# Altium PCB NODE - Copy.PcbDoc
Units mm, origin at the board's own origin, x right, y up, seen from the top; angles counter-clockwise.
Board outline 55.37 x 73.9 mm, 2 copper layers (Top Layer, Bottom Layer); 75 components, 54 nets, 254 pads, 55 vias.
Unrouted connection lines stored in the file: 1.
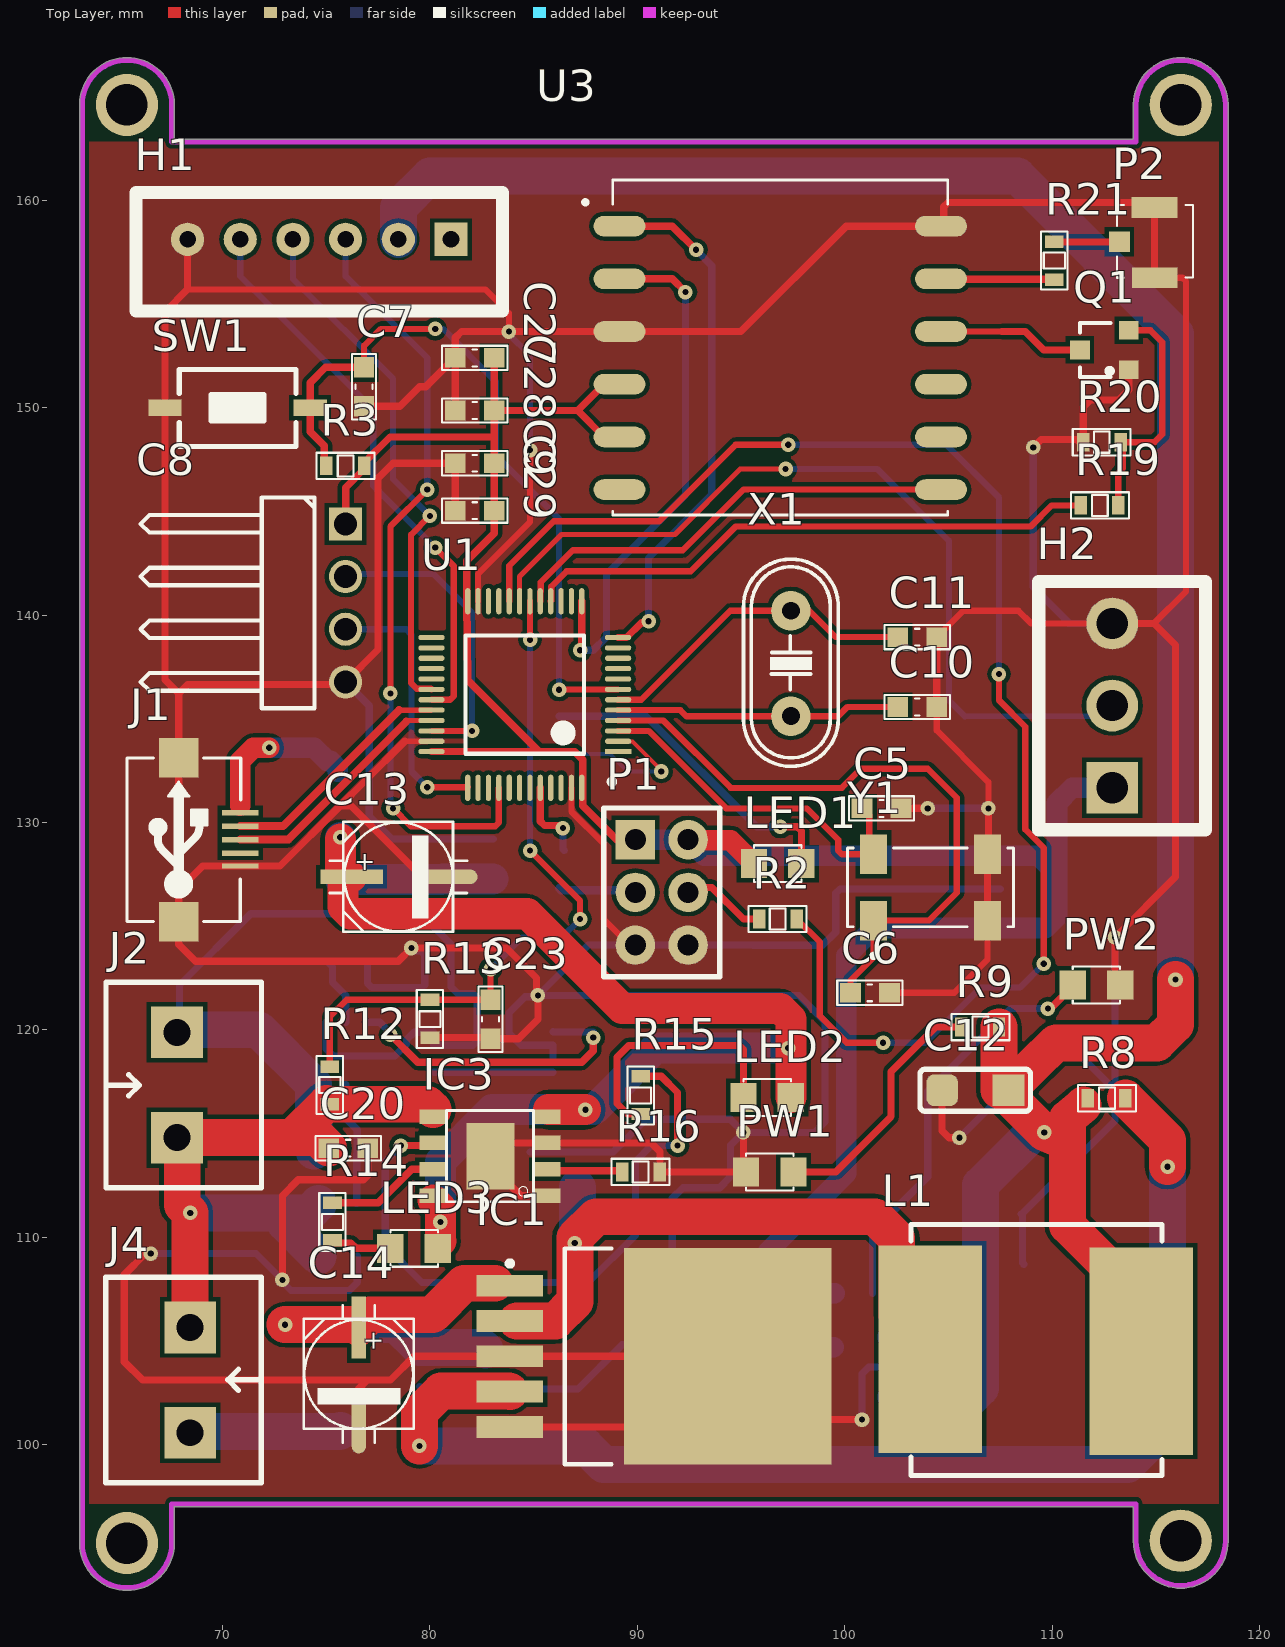
[diagram p0: Top Layer view]
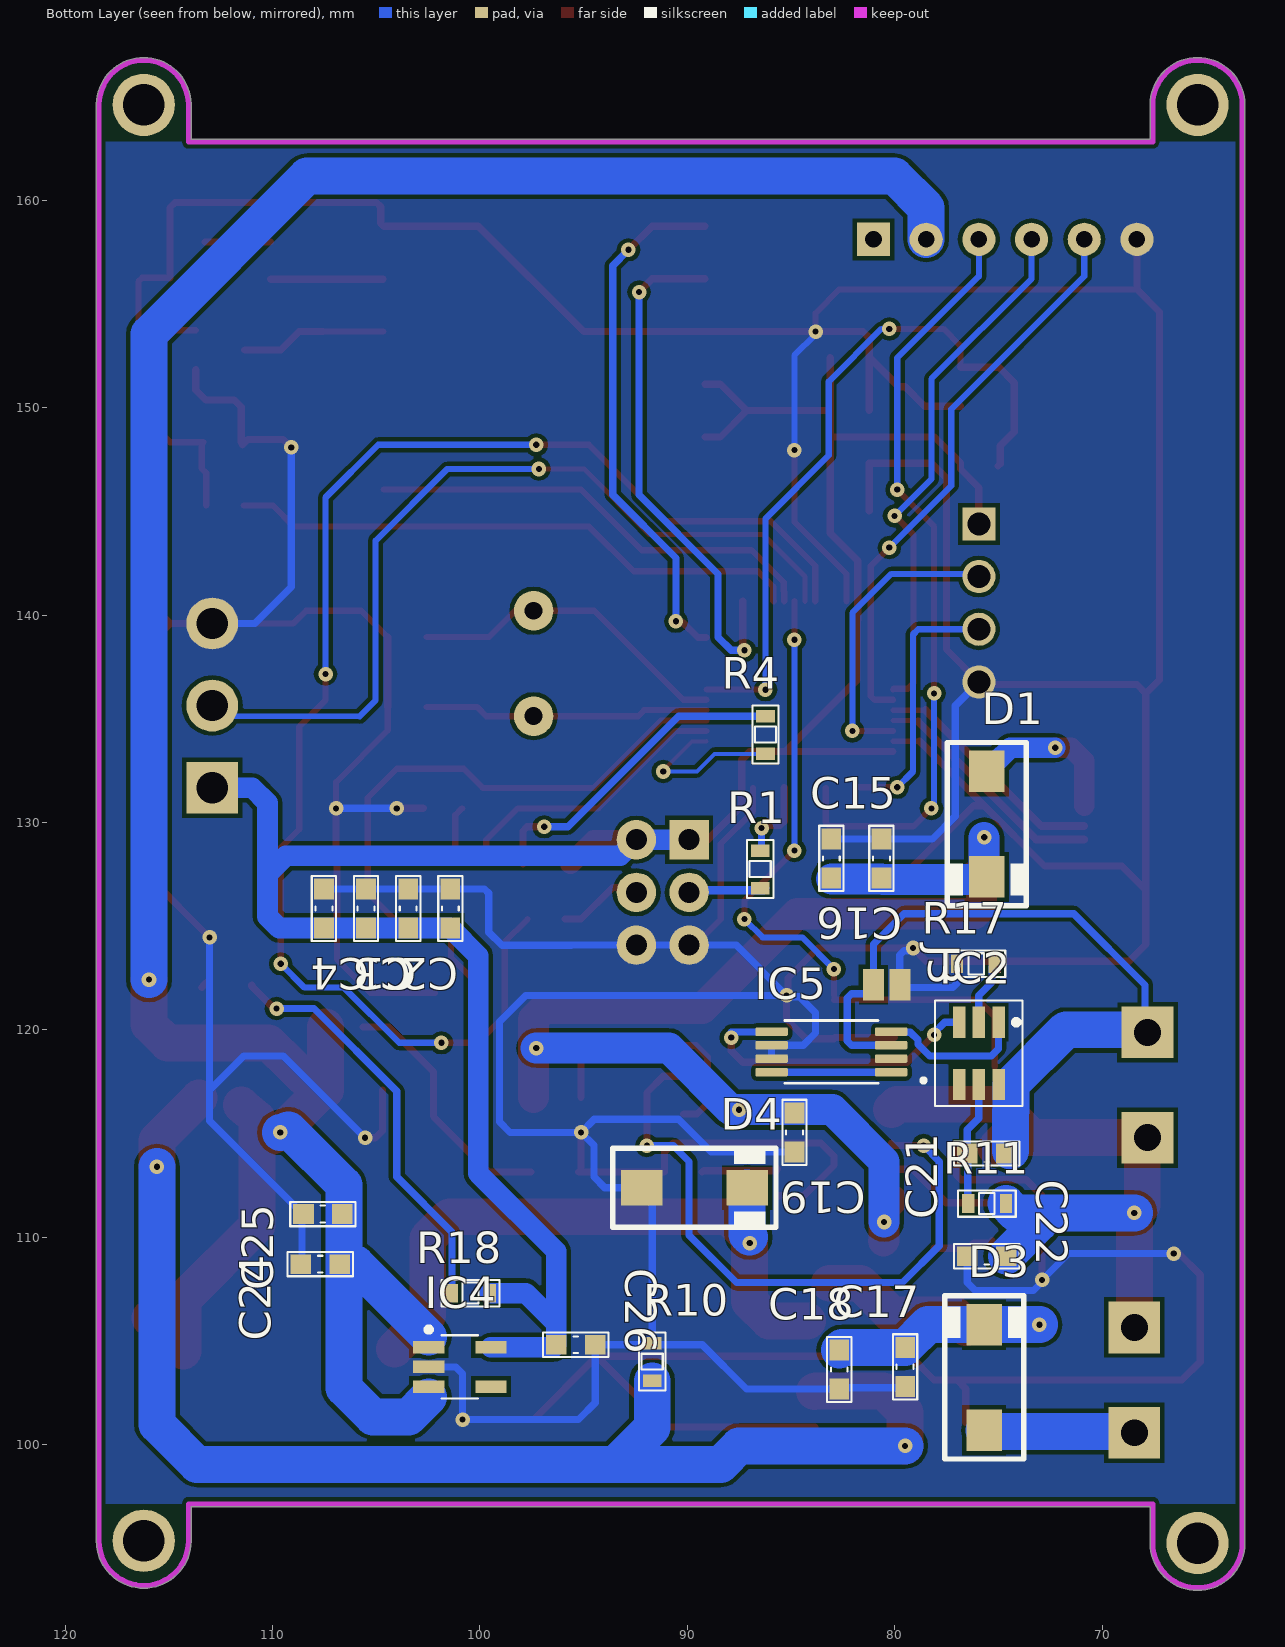
[diagram p1: Bottom Layer view, seen from below]
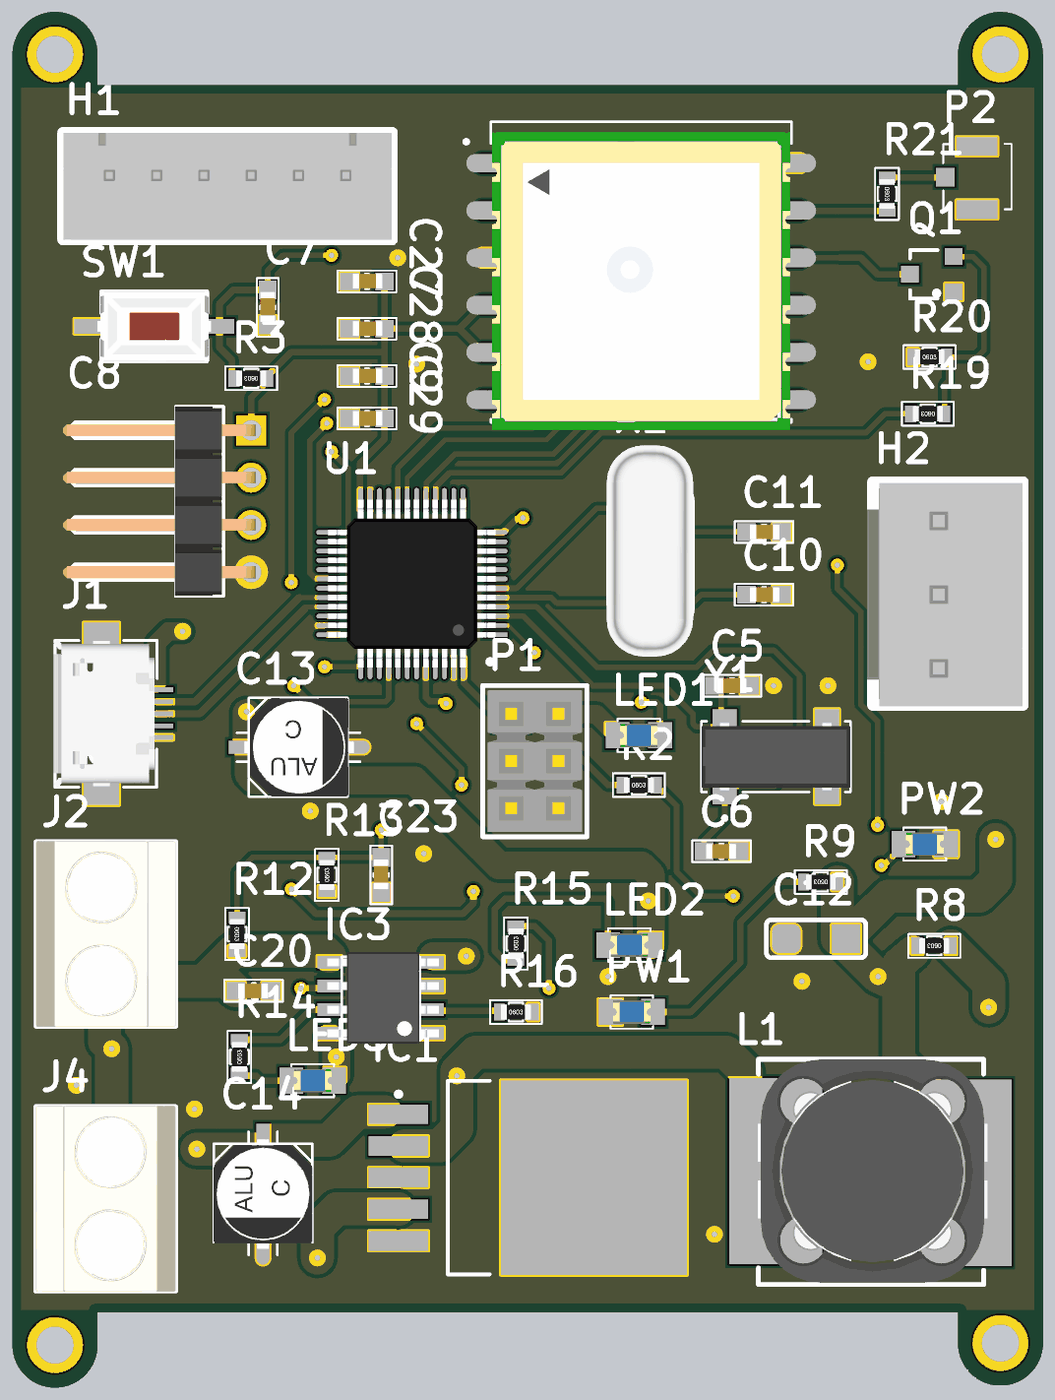
[diagram p2: 3D render of the assembled board from above, using the file's embedded part models]
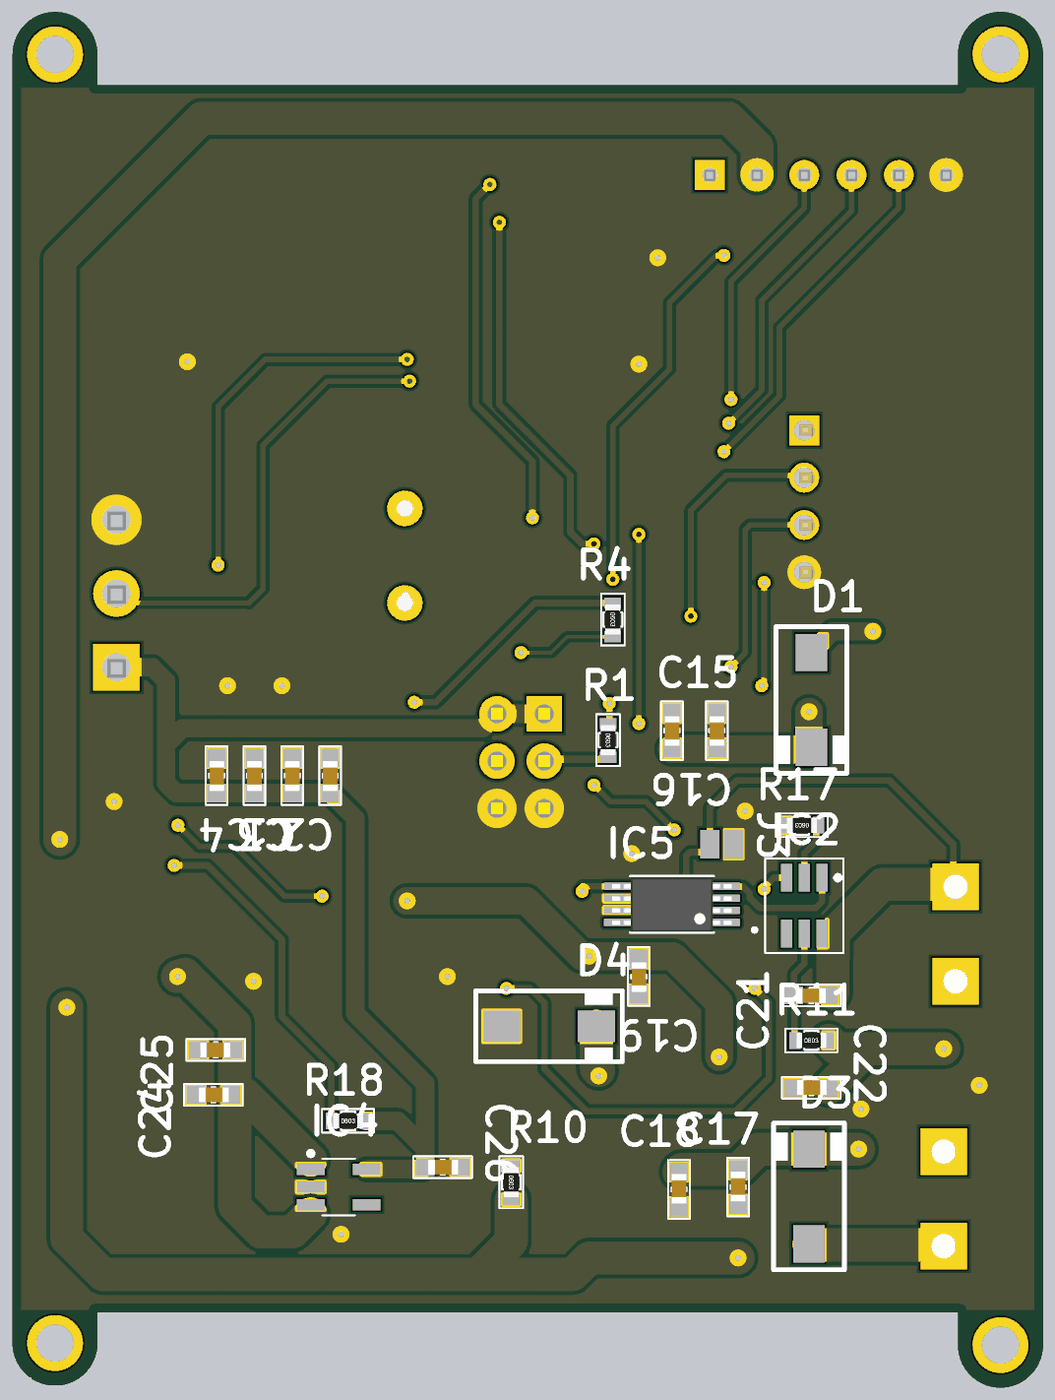
[diagram p3: 3D render of the assembled board from below, using the file's embedded part models]

## Layer stack, top to bottom
Top Solder: solder mask 0.0102, Solder Resist, Dk 3.5
Top Layer: signal copper 0.0356
Dielectric 1: dielectric 0.32, FR-4, Dk 4.8
Bottom Layer: signal copper 0.0356
Bottom Solder: solder mask 0.0102, Solder Resist, Dk 3.5

## Board outline
63.119,95.249 cw(c63.246,95.25) 63.119,95.254 63.119,164.609 cw(c63.246,164.609) 63.119,164.612 cw(c65.405,164.592) 67.691,164.611 cw(c67.564,164.61) 67.691,164.61 67.691,162.941 113.919,162.941 113.919,164.609 cw(c114.046,164.609) 113.923,164.641 cw(c116.205,164.592) 118.487,164.642 cw(c118.364,164.61) 118.491,164.61 118.491,95.36 cw(c118.364,95.36) 118.491,95.354 cw(c116.205,95.377) 113.919,95.353 cw(c114.046,95.359) 113.919,95.359 113.919,97.028 67.691,97.028 67.691,95.251 cw(c67.564,95.251) 67.691,95.244 cw(c65.405,95.268)

## Design rules (kind name [scope] priority, off if disabled: settings)
Clearance [All] p1: gap=0.2 ignorepadtopadclearanceinfootprint=TRUE
DiffPairsRouting [All] p1: maxlimit=0.254 minlimit=0.254 mostfreqgap=0.254 toplayer_minwidth=0.381 toplayer_maxwidth=0.381 toplayer_prefwidth=0.381 bottomlayer_minwidth=0.381 bottomlayer_maxwidth=0.381 bottomlayer_prefwidth=0.381 maxuncoupledlength=12.7
PolygonConnect [All] p1: connectstyle=Direct reliefconductorwidth=0.254 reliefentries=4 polygonreliefangle="90 Angle" airgapwidth=0.254
RoutingVias [All] p1: holewidth=0.3 width=0.7 viastyle="Through Hole" minholewidth=0.3 minwidth=0.7 maxholewidth=0.3 maxwidth=0.7
SolderMaskExpansion [All] p1: expansion=0.102
Width [All] p1: maxlimit=1.778 minlimit=0.2 preferedwidth=0.3 minimp=50.000000 maximp=50.000000 favimp=50.000000
29 further rules are at their usual default settings.

## Classes and differential pairs
component class 3.GPS: C27 C28 C29 P2 Q1 R19 R20 R21
component class 2.POWER_NODE: C12 C13 C14 C15 C16 C17 C18 C19 C20 C21 C22 C23 C24 C25 C26 D3 D4 IC1 IC2 IC3 IC4 IC5 J2 J3 J4 L1 LED2 LED3 PW1 PW2 R8 R9 R10 R11 R12 R13 R14 R15 R16 R17 R18
component class 1.MCU_NODE: C1 C2 C3 C4 C5 C6 C7 C8 C9 C10 C11 D1 H1 H2 J1 LED1 P1 R1 R2 R3 R4 SW1 U1 X1 Y1
differential pair USB: +USB_P -USB_N

## Components (designator, comment, footprint, x,y, rotation, side; value= is the part's Value field where it differs from the comment)
C1 "104,0603" CAP_0603 103.456,125.857 r270 bottom value=33p
C2 "104,0603" CAP_0603 101.424,125.857 r270 bottom value=33p
C3 "104,0603" CAP_0603 105.488,125.857 r270 bottom value=33p
C4 "104,0603" CAP_0603 107.52,125.857 r270 bottom value=33p
C5 "20pF,0603" CAP_0603 101.778,130.683 r180 top value=33p
C6 "20pF,0603" CAP_0603 101.219,121.793 r180 top value=33p
C7 "100nF,0603" CAP_0603 76.835,151.003 r90 top value=33p
C8 "Header4" JP4-D1C 73.406,135.509 r270 top
C9 "104,0603" CAP_0603 82.169,147.32 r0 top value=33p
C10 "20pF,0603" CAP_0603 103.505,135.572 r0 top value=33p
C11 "20pF,0603" CAP_0603 103.505,138.938 r0 top value=33p
C12 "220uF" CAP_TANTALUM_3216 106.299,117.094 r180 top value=220uF,tantalum3216
C13 "470uF/63V,ALU-SMD-C" CAP-ALU-SMD-C 78.523,127.381 r0 top value="Cap 470uF/63V"
C14 "470uF/63V, ALU-SMD-C" CAP-ALU-SMD-C 76.581,103.378 r270 top value="Cap 470uF/63V"
C15 "4.7uF" CAP_0603 80.645,128.27 r270 bottom value=4.7uF,0603
C16 "4.7uF" CAP_0603 83.058,128.27 r270 bottom value=100nF,0603
C17 "4.7uF" CAP_0603 79.502,103.759 r90 bottom value=4.7uF,0603
C18 "4.7uF" CAP_0603 82.677,103.632 r90 bottom value=100nF,0603
C19 "100nF,0603" CAP_0603 84.836,115.062 r270 bottom value=33p
C20 "100nF,0603" CAP_0603 76.073,114.3 r180 top value=33p
C21 "100nF,0603" CAP_0603 75.565,114.046 r0 bottom value=33p
C22 "100nF,0603" CAP_0603 75.565,109.093 r180 bottom value=33p
C23 "100nF,0603" CAP_0603 82.931,120.523 r90 top value=33p
C24 "4.7uF" CAP_0603 107.696,108.712 r180 bottom
C25 "10nF" CAP_0603 107.569,111.125 r0 bottom value=10uF
C26 "10uF" CAP_0603 95.377,104.826 r180 bottom
C27 "4.7uF" CAP_0603 82.169,152.4 r0 top value=10uF,0603
C28 "4.7uF" CAP_0603 82.169,149.86 r0 top value=100nF,0603
C29 "4.7uF" CAP_0603 82.169,145.034 r0 top value=100nF,0603
D1 "M7" SMA 75.565,129.921 r270 bottom value=1N4007
D3 "M7" SMA 75.692,103.251 r90 bottom value=1N4007
D4 "SMA" SMA 89.662,112.395 r180 bottom
H1 "Header 6P 2.54 Duc Thang" XH2.54M-6 81.026,158.115 r180 top
H2 "Header 3P VH3.96 Duc Thang" VH3.96M-3 112.903,133.656 r90 top
IC1 "LM2596" TO-263 89.861,104.267 r0 top
IC2 "DW01A" SOT23-6 75.946,118.872 r270 bottom
IC3 "TP4056" TP4056 82.906,113.919 r180 top
IC4 "AP7335A-33W5-7" SOT23-5 100.965,103.759 r180 bottom
IC5 "FS8205A" FS8205A 83.058,118.999 r0 bottom
J1 "USB-5" USB-M1 70.866,129.174 r90 top
J2 "JP2" KF2-5.08 67.818,117.348 r90 top
J3 "Jumper2" JUMPER2 79.756,122.174 r180 bottom
J4 "JP2" KF2-5.08 68.453,103.124 r270 top
L1 "33uH" Inductor_SMD 115.3,98.521 r90 top value=220uH
LED1 "LED" LED-0805-Blue 95.631,128.016 r0 top value="LED 3 ly Single Colour"
LED2 "LED" LED-0805-Blue 97.409,116.751 r180 top value="LED 3 ly Single Colour"
LED3 "LED" LED-0805-Blue 80.391,109.474 r180 top value="LED 3 ly Single Colour"
P1 "Header 3x2" "Header 3x2" 89.916,129.174 r270 top
P2 "IPX" IPXS 113.665,157.988 r180 top
PW1 "3V8" LED-0805-Blue 97.536,113.157 r180 top value=Red
PW2 "LED 0805" LED-0805-Blue 110.998,122.174 r0 top value=Red
Q1 "2SC1815" SOT23 112.522,152.781 r90 top value=C1815
R1 "100k,0603" RES-SMD-0603 86.487,127.762 r270 bottom
R2 "100k,0603" RES-SMD-0603 96.774,125.349 r0 top
R3 "4k7,0603" RES-SMD-0603 75.946,147.193 r180 top
R4 "510R,0603" RES-SMD-0603 86.233,134.239 r270 bottom
R8 "10k,0603" RES-SMD-0603 112.649,116.713 r180 top value=10k
R9 "1k,0603" RES-SMD-0603 106.553,120.142 r180 top value=1k
R10 "4.7k,0603" RES-SMD-0603 91.694,104.013 r270 bottom value=3.3k
R11 "0.1k,0603" RES-SMD-0603 75.565,111.633 r180 bottom
R12 "30k,0603" RES-SMD-0603 75.184,117.348 r270 top
R13 "100k,0603" RES-SMD-0603 80.01,120.523 r90 top
R14 "1k,0603" RES-SMD-0603 75.311,110.744 r90 top
R15 "1k,0603" RES-SMD-0603 90.169,116.84 r90 top
R16 "1k2,0603" RES-SMD-0603 90.17,113.157 r0 top
R17 "1k,0603" RES-SMD-0603 76.073,123.19 r0 bottom
R18 "1k" RES-SMD-0603 100.457,107.315 r180 bottom
R19 "4k7,0603" RES-SMD-0603 112.306,145.288 r180 top
R20 "10k,0603" RES-SMD-0603 112.395,148.336 r0 top
R21 "0R,0603" RES-SMD-0603 110.109,157.099 r270 top
SW1 "SW" SW-SMD 70.739,149.987 r180 top value="SW chip 2 pin"
U1 "STM32" "LQFP 48" 84.582,136.144 r180 top
U3 "L80-M39" XCVR_L80-M39 96.901,152.4 r0 top
X1 "4Mhz" XT2 97.409,137.668 r270 top
Y1 "MC-306_32.768K-E3" XTAL_MC-306_32.768K-E3 104.14,126.873 r90 top

## Footprints (in the part's own frame and the unit in brackets; to place one, negate y for a bottom-side part, rotate by r counter-clockwise, add the part's x,y. Pads: shape width x height; smd on the part's side, far side on the other; paste and mask are expansions set on the pad)
CAP-ALU-SMD-C [mm]
  rect 3x0.7 smd: 1(-2.286,0)
  oval 3x0.7 smd: 2(2.286,0)
  silkscreen extent -3.35,-2.65 3.28,2.65, body extent -2.95,-2.65 2.95,2.65, height 5.41
CAP_0603 [mm]
  rect 1x0.95 smd mask+0.076: 1(-0.94,0) 2(0.94,0)
  silkscreen extent -1.57,-0.58 1.57,0.58, body extent -0.77,-0.39 0.83,0.41, height 0.9
CAP_TANTALUM_3216 [mil]
  rect 60x60 smd: 1(-62.99,0)
  rrect50% 60x60 smd: 2(62.99,0)
  silkscreen extent -105,-40 105,40, body extent -67,-35 67,35, height 67
FS8205A [mm]
  rrect25% 1.56x0.4 smd: 1(-2.88,1.031) 2(-2.88,0.381) 3(-2.88,-0.269) 4(-2.88,-0.919) 5(2.88,-0.919) 6(2.88,-0.269) 7(2.88,0.381) 8(2.88,1.031)
  silkscreen extent -4.54,-1.46 2.25,1.57, body extent -3.2,-1.4 3.2,1.53, height 1.2
"Header 3x2" [mil] "Connector; Header; 6 Position; 2 Row; Solder Pad 35mil"
  rect 75x75 hole 40: 1(0,0)
  round 75 hole 40: 2(0,100) 3(100,0) 4(100,100) 5(200,0) 6(200,100)
  silkscreen extent -60,-60 260,160, body extent -50,-50 250,150, height 83
Inductor_SMD [mm]
  rect 10x5 smd: 1(6.096,11.176) 2(6,1)
  silkscreen extent 0,0 12.1,12.1, body extent 0.1,-0.2 12.1,12.14, height 7.15
IPXS [mm] "SOT 23 _ 1-3-2"
  rect 1x1 smd: 1(0.415,-0.01)
  rect 2.2x1 smd: 2(-1.273,-1.658) 3(-1.278,1.73)
  silkscreen extent -3.13,-1.79 0.53,1.73, body extent -2.83,-1.49 0.31,1.56, height 1.55
JP4-D1C [mm] "4 pins, 1 row, right angled, gold plating"
  rect 1.6x1.6 hole 1.1: 1(-8.89,2.54)
  round 1.6 hole 1.1: 2(-6.35,2.54) 3(-3.81,2.54) 4(-1.27,2.54)
  silkscreen extent -10.16,-7.34 0,1.04, body extent -10.16,-7.57 0,2.79, height 2.54
JUMPER2 [mil]
  rect 40x60 smd: 1(-50,0) 2(0,0)
KF2-5.08 [mm]
  rect 2.5x2.5 hole 1.3: 1(-2.54,0) 2(2.54,0)
  silkscreen extent -4.95,-4.08 4.95,3.43, body extent -5,-4.07 5,3.43, height 10
LED-0805-Blue [mil]
  rect 50x55 smd: 1(0,0) 2(90,0)
  silkscreen extent 0,-35 90,35, body extent 5,-25 85,25, height 43
"LQFP 48" [mm]
  rect 1.27x0.25 smd: 1(-4.498,2.725)
  oval 1.27x0.25 smd: 2(-4.498,2.225) 3(-4.498,1.725) 4(-4.498,1.225) 5(-4.498,0.725) 6(-4.498,0.225) 7(-4.498,-0.275) 8(-4.498,-0.775) 9(-4.498,-1.275) 10(-4.498,-1.775) 11(-4.498,-2.275) 12(-4.498,-2.775) 25(4.498,-2.775) 26(4.498,-2.275) 27(4.498,-1.775) 28(4.498,-1.275) 29(4.498,-0.775) 30(4.498,-0.275) 31(4.498,0.225) 32(4.498,0.725) 33(4.498,1.225) 34(4.498,1.725) 35(4.498,2.225) 36(4.498,2.725)
  oval 0.25x1.27 smd: 13(-2.75,-4.524) 14(-2.25,-4.524) 15(-1.75,-4.524) 16(-1.25,-4.524) 17(-0.75,-4.524) 18(-0.25,-4.524) 19(0.25,-4.524) 20(0.75,-4.524) 21(1.25,-4.524) 22(1.75,-4.524) 23(2.25,-4.524) 24(2.75,-4.524) 37(2.75,4.473) 38(2.25,4.473) 39(1.75,4.473) 40(1.25,4.473) 41(0.75,4.473) 42(0.25,4.473) 43(-0.25,4.473) 44(-0.75,4.473) 45(-1.25,4.473) 46(-1.75,4.473) 47(-2.25,4.473) 48(-2.75,4.473)
  silkscreen extent -4.33,-2.88 2.85,4.3, body extent -4.5,-4.53 4.5,4.47, height 1.5
RES-SMD-0603 [mm]
  rect 0.6x0.9 smd: 1(-0.889,0) 2(0.927,0)
  silkscreen extent -1.4,-0.64 1.4,0.64, body extent -0.8,-0.4 0.8,0.4, height 0.43
SMA [mm]
  rect 2x1.7 smd: 1(-2.544,0) 2(2.544,0)
  silkscreen extent -3.94,-1.9 3.94,1.91, body extent -2.87,-1.4 2.87,1.4, height 2.29
SOT23 [mm] "SOT-23; 3 Leads; Body 3.1 x 2.5 mm, inc. leads (LxW max), Alternate Lead Configuration"
  rect 0.9x0.95 smd: 1(-0.95,-1.175) 2(0,1.175) 3(0.95,-1.175)
  silkscreen extent -1.3,-0.38 1.3,1.18
SOT23-5 [mm] "SOT23, 5-Leads, Body 3.0x3.0mm (max), Pitch 0.95mm, IPC Medium Density"
  rect 1.5x0.6 smd: 1(-1.5,0.95) 2(-1.5,0) 3(-1.5,-0.95) 4(1.5,-0.95) 5(1.5,0.95)
  silkscreen extent -1.63,-1.52 0.87,1.92, body extent -1.75,-1.52 1.75,1.53, height 1.45
SOT23-6 [mm] "SOT23, 5-Leads, Body 3.0x3.0mm (max), Pitch 0.95mm, IPC Medium Density"
  rect 1.5x0.6 smd: 1(-1.5,0.95) 2(-1.5,0) 3(-1.5,-0.95) 4(1.5,-0.95) 5(1.5,0) 6(1.5,0.95)
  silkscreen extent -2.54,-2.11 2.54,2.11, body extent -1.75,-1.52 1.75,1.53, height 1.45
SW-SMD [mm] "Switch SMD type"
  rect 1.6x0.8 smd: 1(-3.5,0) 2(3.5,0)
  silkscreen extent -2.82,-1.85 2.82,1.85, body extent -3.05,-1.85 3.05,1.85, height 2.5
TO-263 [mm]
  rect 3.2x1.05 smd: 1(-6,3.4) 2(-6,1.7) 3(-6,0) 4(-6,-1.7) 5(-6,-3.4)
  rect 10x10.45 smd: 6(4.5,0)
  silkscreen extent -6.12,-5.2 -1.1,5.2, body extent -6.58,-5.2 7.57,5.2, height 4.65
TP4056 [mm]
  rect 1.3x0.7 smd: 1(-2.75,1.905) 2(-2.75,0.635) 3(-2.75,-0.635) 4(-2.75,-1.905) 5(2.75,-1.905) 6(2.75,-0.635) 7(2.75,0.635) 8(2.75,1.905)
  rect 2.3x3.2 smd: 3(-0.025,0)
  silkscreen extent -2.1,-2.2 2.1,2.2, body extent -3.13,-2.45 2.87,2.45, height 1.75
USB-M1 [mil]
  rect 10x70 smd: 1(51.18,0) 2(25.59,0) 3(0,0) 4(-25.59,0) 5(-50,0)
  rect 74.8x74.8 smd: 5(-155.51,116.84) 5(155.51,116.84)
  silkscreen extent -155,-1 155,215, body extent -157,5 158,218, height 107
VH3.96M-3 [mm]
  rect 2.5x2.5 hole 1.5: 1(-1.98,0)
  round 2.5 hole 1.5: 2(1.98,0) 3(5.94,0)
  silkscreen extent -4,-4.5 7.96,3.54, body extent -4.08,-4.49 7.92,3.88, height 10.26
XCVR_L80-M39 [mm]
  oval 2.5x1 smd paste-2: 1(-7.75,6.35) 2(-7.75,3.81) 3(-7.75,1.27) 4(-7.75,-1.27) 5(-7.75,-3.81) 6(-7.75,-6.35) 7(7.75,-6.35) 8(7.75,-3.81) 9(7.75,-1.27) 10(7.75,1.27) 11(7.75,3.81) 12(7.75,6.35)
  silkscreen extent -9.5,-7.57 8.08,8.57, body extent -8,-8 8,8, height 7.05
XH2.54M-6 [mm]
  rect 1.6x1.6 hole 0.8: 1(0,0)
  round 1.6 hole 0.8: 2(2.54,0) 3(5.08,0) 4(7.62,0) 5(10.16,0) 6(12.7,0)
  silkscreen extent -2.48,-2.26 15.18,3.46, body extent -2.48,-2.26 15.18,3.48, height 6.91
XT2 [mil] "Footpin for Crystal 2 pin"
  round 75 hole 34: 1(-100,0) 2(100,0)
  silkscreen extent -198,-90 195,90, body extent -233,-93 213,90, height 138
XTAL_MC-306_32.768K-E3 [mm]
  rect 1.9x1.3 smd: 1(-1.6,2.75) 2(-1.6,-2.75) 3(1.6,-2.75) 4(1.6,2.75)
  silkscreen extent -3.4,-4 1.9,4, body extent -1.85,-4 1.85,4, height 2.54

## Part data
C1 C2 C3 C4 C5 C6 C7 C9 C10 C11 C19 C20 C21 C22 C23: library part CapSMD, "Capacitor", LatestRevisionDate=17-Jul-2002, LatestRevisionNote="Re-released for DXP Platform.", PackageReference=RAD-0.3, Published=8-Jun-2000, Publisher="Altium Limited"
C8: "Header IDC, 4 x 1 Pin Vertical 2.54mm Pitch (Non-Boxed, Male)", Manufacturer="W¨¹rth Elektronik eiSos GmbH", partNo=613002143121, ComponentLink1 Description=Manufacturer, ComponentLink1URL=http://www.we-online.com, ComponentLink2 Description=Datasheet, ComponentLink2URL=http://katalog.we-online.de/em/datasheet/6130xx143121.pdf, Created by="Karrer Zheng", Created Date="29 March 2013", NoPins=02
C12: library part CP5, "220µF Molded Tantalum Polymer Capacitor 16V 2917 (7343 Metric) 40mOhm @ 100kHz", Manufacturer="AVX Corporation", Package=2917, Part Number=TCME227M016R0040E, Category=CAPACITOR, User_Description="CAP TANT POLY 220UF 16V 2917"
C13 C14: library part CP3, "Cap 470uF/63V"
C15 C16 C17 C18 C24 C27 C28 C29: library part C, "4.7µF ±10% 35V Ceramic Capacitor X5R 0805 (2012 Metric)", Manufacturer="Samsung Electro-Mechanics", Package=0805, Part Number=CL21A475KLCLQNC, Category=CAPACITOR, User_Description="CAP CER 4.7UF 35V X5R 0805"
C25 C26: library part C, "Cap SMD", Manufacturer="Samsung Electro-Mechanics", Package=0805, Part Number=CL21A106KPFNNNG, Category=CAPACITOR, User_Description="CAP CER 10UF 10V X5R 0805"
D1 D3: library part D1A, "Diode 1A"
D4: library part "Diode Zener", "Zener Diode", LatestRevisionDate=17-Jul-2002, LatestRevisionNote="Re-released for DXP Platform.", PackageReference=DIODE-0.7, Published=8-Jun-2000, Publisher="Altium Limited"
H1 H2: "C?m", Chung_Loai=C?m, Don_Vi=Con
  H1: Ma_Hang=MH001972, Ten_Linh_Kien="Header 6P XH2.54-6P Ð?c Th?ng"
  H2: Ma_Hang=MH001292, Ten_Linh_Kien="Header 3P XH2.54-3P Ð?c Th?ng"
IC1: library part LM2576, "LM2576"
IC2: "One Cell Lithium-ion/Polymer Battery Protection IC"
IC3: "Complete single cell Li-Ion battery with a constant current / constant voltage linear charger"
IC4: Package=SOT23-5, Part Number=AP7335A-33W5-7
J1: Manufacturer=FCI, Manufacturer Part Number=10118193-0001LF, Supplier Part Number 1=609-4616-1-ND, .Checked PCB=RF, .Checked SCH=MM, .Creator=MM, Category="Connectors, Interconnects", ComponentLink1Description=http://portal.fciconnect.com/Comergent//fci/drawing/10118193.pdf, ComponentLink1URL=http://portal.fciconnect.com/Comergent//fci/drawing/10118193.pdf, Connector Type="USB - micro B", Features="Shielded, Solder Retention", Gender=Receptacle, Ingress Protection=-, Mounting Type="Surface Mount, Right Angle, Horizontal", Number of Contacts=5, Packaging="Cut Tape (CT)", Pricing 1="1=0.46, 10=0.433, 25=0.3712, 50=0.3156, 100=0.3032, 250=0.27224, 500=0.25988 (USD)", RoHS="RoHS Compliant", Specifications="USB 2.0", Stock 1=28642, Supplier 1=Digi-Key
J2 J4: "WR-PHD 2.54 mm Angled Socket Header", Manufacturer="W¨¹rth Elektronik eiSos GmbH", partNo=613002143121, ComponentLink1 Description=Manufacturer, ComponentLink1URL=http://www.we-online.com, ComponentLink2 Description=Datasheet, ComponentLink2URL=http://katalog.we-online.de/em/datasheet/6130xx143121.pdf, Created by="Karrer Zheng", Created Date="29 March 2013", NoPins=02
J3: "Jumper, 2-Pin"
L1: library part L1, "22µH Shielded Inductor 1.65A 96mOhm Max Nonstandard", Manufacturer="Bourns Inc.", Package=SMD, Part Number=SRR0745A-220M, Category=INDUCTORS, User_Description="FIXED IND 22UH 1.65A 96 MOHM SMD"
LED1 LED2 LED3: "LED Single colour Green and Red"
P1: "Header, 6-Pin, 2-Row", LatestRevisionDate=17-Jul-2002, LatestRevisionNote="Re-released for DXP Platform.", Publisher="Altium Limited"
P2: library part IPXSx66, "Antenna GSM GPS", Manufacturer="TE Connectivity AMP Connectors", Package=SMD, Part Number=2334884-1, Category=Connectors, User_Description="UMCC MICRO-COAX RECEPTACLE, GEN"
PW1 PW2: library part LED, "LED RED DIFFUSED 0805 SMD", Manufacturer="OSRAM Opto Semiconductors Inc.", Package=0805, Part Number="LS R976-NR-1", Category="LED SMD", User_Description="LED RED DIFFUSED 0805 SMD"
Q1: "NPN 600mW, ECB", =C828
R1 R2 R3 R4 R11 R12 R13 R14 R15 R16 R17 R19 R20 R21: library part "Resistor - SMD", "Resistor SMD", Manufacturer="Generic Components", CLASS=Passive, Published=08/06/2000, Publisher="Altium Hobart Technology Centre"
R8: library part R, "RES SMD 10K OHM 1% 1/8W 0805", Manufacturer=Yageo, Package=0805, Part Number=RC0805FR-0710KL, Category=RESISTORS, User_Description="RES SMD 10K OHM 1% 1/8W 0805"
R9 R18: library part R, "Resistor 1/4W", Manufacturer=Yageo, Package=0805, Part Number=RC0805FR-071KL, Category=RESISTORS, User_Description="RES SMD 1K OHM 1% 1/8W 0805"
R10: library part R, "RES SMD 3.3K OHM 1% 1/8W 0805", Manufacturer=Yageo, Package=0805, Part Number=RC0805FR-073K3L, Category=RESISTORS, User_Description="RES SMD 3.3K OHM 1% 1/8W 0805"
SW1: library part SW2, "Switch button 2 pin"
U1: library part STM32F103C8T6, "STM32 ARM-based 32-bit MCU with 64 Kbytes Flash, 64-pin LQFP, Industrial Temperature"
U3: "L80 is an ultra compact GPS POT (Patch on Top) module with an embedded 15.0mm × 15.0mm × 4.0mm patch antenna.", Package=None, Availability=Warning, Check_prices=https://www.snapeda.com/parts/L80-M39/Quectel/view-part/51186/?ref=eda, MF=Quectel, MP=L80-M39, Price=None, Purchase-URL=https://pricing.snapeda.com/search/part/L80-M39/?ref=eda, SnapEDA_Link=https://www.snapeda.com/parts/L80-M39/Quectel/view-part/51186/?ref=snap
X1: library part XT2, "Crystal For all Crystal 2pin."
Y1: "CRYSTAL 32.7680KHZ 6PF SMD", Package="NON STANDARD-4 EPSON", Availability="In Stock", Check_prices=https://www.snapeda.com/parts/MC-306%2032.768K-E3/EPSON/view-part/?ref=eda, MF=EPSON, MP="MC-306 32.768K-E3", Price=None, Purchase-URL="https://pricing.snapeda.com/search/part/MC-306 32.768K-E3/?ref=eda", SnapEDA_Link=https://www.snapeda.com/parts/MC-306%2032.768K-E3/EPSON/view-part/?ref=snap

## Free pads (board coordinates)
  round 3 hole 2: 0(65.405,95.268) 0(65.405,164.592) 0(116.205,95.377) 0(116.205,164.592)

## Via types
v1: diameter 0.7, hole 0.3, Top Layer to Bottom Layer, 55 vias

## Nets (pads, with @x,y where several pads share a name; then routed paths per layer and width w, separated by ;. In a path a pad name is that pad's centre, name@x,y a point inside that pad or via, vN(x,y) a via of type N, cw(c..) or ccw(c..) an arc to the next point about the centre after c; other vN are vias at no path point)
3V3: C1.2 C2.2 C3.2 C4.2 C8.1 C9.2 C26.1 C27.2 C28.2 C29.2 H2.1 IC4.5 LED1.1 P1.1 P1.2 R3.1 R18.2 U1.24 U1.36 U1.48 U3.4 U3.5 | length 124.4
  Top Layer w0.2: 85.275,133.419 85.344,133.419
  Top Layer w0.35: C8.1 75.946,146.154 76.835,147.043 R3.1 76.835,147.343 78.082,148.59 83.109,148.59 ; U1.36 85.275,133.419 81.832,136.862 81.788,140.667 81.788,142.621 83.109,143.942 C29.2 C9.2 83.109,148.59 ; C27.2 C28.2 ; 85.344,133.419 86.995,133.419 87.382,133.032 87.382,130.804 89.012,129.174 P1.1 ; U3.5 88.401,148.59 87.131,149.86 ; U3.4 88.401,151.13 87.131,149.86 ; 83.109,148.59 C28.2 ; C28.2 87.131,149.86
  Top Layer w1: P1.2 92.48,129.15 94.497,129.15 LED1.1
  Bottom Layer w1: P1.1 P1.2 93.233,128.397 109.347,128.397 110.236,127.508 ; IC4.5 96.434,104.709 C26.1 96.317,105.842 ; R18.2 97.79,107.315 96.317,105.842 ; H2.1 110.975,131.676 110.236,130.937 110.236,127.508 ; 96.317,105.842 96.317,109.33 100.076,113.089 100.076,123.569 C2.2 C1.2 C3.2 C4.2 109.677,124.917 110.236,125.476 110.236,127.508
3V8: C12.1 C24.2 C25.1 H1.2 IC4.1 IC4.3 L1.2 R8.2 R9.1 | length 133.4
  Top Layer w1.778: R9.1 107.442,117.094 C12.1@107.721,116.967 ; R8.2@111.506,116.375 110.744,115.734 110.744,114.566 ; L1.2@115.897,106.118 L1.2 114.3,107.021 110.744,110.577 110.744,114.566 ; v1(115.951,122.428) 115.951,120.269 115.062,119.38 110.185,119.38 107.875,117.118 C12.1@107.721,116.967 ; C12.1@107.721,116.967 v1(109.626,115.062) 110.744,114.566
  Bottom Layer w1.778: H1.2 78.486,159.639 80.01,161.163 108.331,161.163 115.951,153.543 v1(115.951,122.428) ; 102.465,102.316 103.435,101.346 105.156,101.346 106.553,102.743 C24.2@106.553,108.712 ; 102.465,105.202 105.975,108.712 C24.2@106.553,108.712 ; v1(109.626,115.062) 109.22,115.189 106.553,112.522 C24.2@106.553,108.712
5V: C13.1 C15.2 C16.2 C19.1 D1.2 IC3.4 IC3.8 LED2.1 LED3.1 | length 66.3
  Top Layer w1.5: C13.1@75.692,127.508 v1@75.692,129.21 ; C13.1 75.969,127.381 75.819,127.231 75.819,125.935 76.151,125.603 84.709,125.603 89.281,121.031 96.901,121.031 97.409,120.523 LED2.1 ; IC3.8@80.156,111.791 80.518,111.429 v1(80.518,110.744) 80.518,109.855 LED3.1@80.537,109.836 ; IC3.4@85.725,116.158 v1(87.503,116.158)
  Bottom Layer w1.5: v1(75.692,129.286) 75.692,127.25 80.565,127.25 80.645,127.279 C16.2@83.058,127.279 ; v1(80.518,110.744) 80.518,113.666 83.01,116.158 84.836,116.158 v1(87.503,116.158) 87.92,116.158 90.888,119.126 v1(97.282,119.126)
ADC2: H2.2 U1.19 | length 41.6
  Top Layer w0.25: U1.19 84.332,141.863 86.36,143.891 91.821,143.891 94.973,147.043 v1(97.155,147.043)
  Bottom Layer w0.25: 105.791,135.128 112.395,135.128 H2.2
  Bottom Layer w0.3: v1(97.155,147.043) 101.574,147.043 105.029,143.588 105.029,135.89 105.791,135.128
ANT: H1.1
BOOT0: R1.1 U1.44 | length 3.9
  Top Layer w0.35: U1.44 85.332,130.06 85.537,129.855 86.299,129.855 v1(86.423,129.731)
  Bottom Layer w0.35: v1(86.423,129.731) 86.423,128.715 R1.1
BOOT1: R2.2 U1.20 | length 70.2
  Top Layer w0.3: U1.20 83.832,142.379 85.979,144.526 91.059,144.526 94.743,148.21 v1(97.282,148.21) ; R2.2 98.806,124.244 98.806,120.682 100.108,119.38 v1(101.854,119.38) ; v1(107.442,137.16) 107.442,135.89 108.712,134.62 108.712,129.667 109.601,128.778 v1(109.601,123.19)
  Bottom Layer w0.3: v1(97.282,148.21) 104.901,148.21 107.442,145.669 v1(107.442,137.16) ; v1(101.854,119.38) 103.886,119.38 106.553,122.047 108.458,122.047 v1(109.601,123.19)
EX_ANT: R21.2 U3.11 | length 5.5
  Top Layer w0.3: U3.11 U3.11@104.67,156.191 ; R21.2@110.09,156.191 R21.2
  Top Layer w0.35: U3.11@104.67,156.191 R21.2@110.09,156.191
GND: C1.1 C2.1 C3.1 C4.1 C5.1 C6.1 C7.1 C8.4 C9.1 C10.2 C11.2 C12.2 C13.2 C14.2 C15.1 C16.1 C17.1 C18.1 C19.2 C20.1 C22.1 C23.1 C24.1 C25.2 C26.2 C27.1 C28.1 C29.1 D4.1 H1.6 H2.3 IC1.3 IC1.5 IC1.6 IC3.1 IC3.3 IC4.2 IC5.6 IC5.7 J1.5 J3.2 P1.5 P1.6 P2.2 P2.3 PW1.2 PW2.2 Q1.1 R10.1 R13.1 R16.2 R17.2 R20.1 SW1.2 U1.23 U1.35 U1.47 U3.3 U3.12 Y1.2 Y1.3 | length 548.5
  Top Layer w0.25: 78.801,133.919 U1.35
  Top Layer w0.3: 68.326,155.702 82.677,155.702 83.82,154.559 v1(83.82,153.67) ; U1.23 82.332,141.986 84.836,144.49 v1(84.836,147.955) ; U1.47 86.832,130.532 88.392,128.972 88.392,125.349 89.647,124.094 P1.5 ; C6.1 105.283,121.793 106.89,123.4 Y1.2 ; C10.2 104.445,134.442 106.934,131.953 v1(106.934,130.683) ; C11.2 105.715,140.208 108.377,140.208 108.989,139.596 H2.3 ; 114.912,139.596 116.459,141.143 116.459,156.088 116.283,156.263 114.948,156.263 P2.3
  Top Layer w0.35: v1(66.548,109.22) 66.294,109.22 65.278,108.204 65.278,104.013 66.167,103.124 77,103.124 ; H1.6 68.326,155.702 67.239,154.615 SW1.2 67.239,136.883 67.898,136.224 ; v1(72.898,107.95) 72.898,112.014 73.66,112.776 76.808,112.776 77.013,112.981 C20.1 ; C14.2 76.581,102.705 77,103.124 ; C7.1 78.562,150.063 79.502,151.003 79.807,151.003 81.204,152.4 C27.1 ; 78.801,133.919 76.835,131.953 75.686,130.804 ; R13.1 82.88,119.634 C23.1 84.277,119.583 85.217,120.523 v1(85.217,121.666) 85.15,121.733 85.15,122.505 83.703,123.952 v1(79.121,123.952) 78.486,123.317 68.707,123.317 67.898,124.126 67.898,125.224 67.898,126.746 ; C13.2 79.629,127.381 76.206,130.804 75.686,130.804 ; C29.1 C9.1 78.232,147.32 77.51,146.598 77.51,138.343 C8.4 75.819,136.652 68.326,136.652 67.898,136.224 ; C28.1 C27.1 ; IC1.5 90.961,100.867 IC1.6 ; IC3.1 84.386,112.014 82.931,113.469 82.931,113.919 83.566,114.554 85.656,114.554 90.675,114.554 91.097,114.132 R16.2 PW1.2 95.123,113.284 v1(95.123,115.062) ; v1(100.838,101.219) 97.409,101.219 IC1.6 ; C5.1 v1(104.013,130.683) ; C10.2 C11.2 ; C12.2 104.699,115.138 105.029,114.808 v1(105.537,114.808) ; Y1.2 Y1.3 106.934,128.517 v1(106.934,130.683) ; v1(109.093,148.082) 109.474,148.463 111.19,148.463 111.442,148.21 111.442,148.399 R20.1 111.506,150.036 111.838,150.368 113.209,150.368 113.697,150.856 Q1.1 ; H2.3 114.912,139.596 115.951,138.557 115.951,127.381 v1(113.03,124.46) 113.03,122.428 PW2.2 PW2.2@113.411,122.047 ; P2.3 114.938,156.263 P2.2 114.691,159.893 104.98,159.893 104.775,159.688 104.775,158.874 U3.12 100.076,158.75 94.996,153.67 U3.3 v1(83.82,153.67) 81.534,153.67 81.229,153.365 C27.1 ; 67.898,126.746 67.898,133.124 67.898,136.224 ; 67.898,126.746 69.056,127.904 70.866,127.904 72.786,127.904 75.686,130.804 ; 77,103.124 78.105,103.124 79.248,104.267 IC1.3 IC1.6
  Bottom Layer w0.3: v1(83.82,153.67) 83.82,153.535 84.836,152.519 v1(84.836,147.955)
  Bottom Layer w0.35: v1@66.675,109.22 71.628,109.22 v1(72.898,107.95) 72.898,107.855 73.311,107.442 76.124,107.442 76.505,107.823 C22.1 ; C8.4 77.089,135.636 77.089,130.302 78.181,129.21 C15.1 C16.1 ; R17.2 77,122.252 77.205,122.047 79.629,122.047 J3.2 79.756,123.62 79.551,123.825 v1@79.343,123.825 ; C17.1 79.566,102.756 82.614,102.756 C18.1 87.147,102.692 89.281,104.826 91.618,104.826 R10.1 ; C19.2 88.846,114.122 90.421,115.697 94.488,115.697 v1(95.123,115.062) ; IC5.7 IC5.6 84.406,119.268 83.82,119.854 83.82,120.826 84.593,121.599 85.15,121.599 v1(85.217,121.666) ; IC4.2 101.17,103.759 100.838,103.427 v1(100.838,101.219) 95.25,101.219 94.437,102.032 C26.2 91.77,104.826 R10.1 ; v1(104.013,130.683) v1(106.934,130.683) ; v1(105.537,114.808) 109.474,118.745 111.379,118.745 113.03,117.094 ; C4.1 C3.1 C1.1 C2.1 99.773,126.797 99.568,126.592 99.568,124.714 98.933,124.079 95.595,124.079 95.58,124.094 P1.6 P1.5 87.645,124.094 v1(85.217,121.666) ; C24.1 108.572,108.775 108.572,111.061 C25.2 108.534,111.125 113.03,115.621 113.03,117.094 ; v1(109.093,148.082) 109.093,141.351 110.848,139.596 H2.3 ; v1(113.03,124.46) 113.03,117.094 ; v1(85.217,121.666) 97.79,121.666 99.06,120.396 99.06,115.57 98.552,115.062 v1(95.123,115.062) ; R10.1 91.694,111.883 D4.1 93.98,112.395 94.504,112.919 94.504,114.443 v1(95.123,115.062)
LED: R4.2 U1.2 | length 8
  Top Layer w0.2: U1.2 89.09,133.91 89.774,133.91 91.166,132.518 v1(91.166,132.461)
  Bottom Layer w0.2: R4.2 88.684,133.312 89.535,132.461 v1(91.166,132.461)
NetC7_2: C7.2 R3.2 SW1.1 U1.7 | length 35
  Top Layer w0.3: C7.2 76.835,152.984 77.648,153.797 v1(80.264,153.797) ; v1(86.233,136.398) 86.254,136.419 U1.7
  Top Layer w0.35: R3.2 74.915,147.297 74.915,148.168 74.239,148.844 SW1.1 74.239,151.201 74.981,151.943 C7.2
  Bottom Layer w0.3: v1(80.264,153.797) 80.645,153.797 83.185,151.257 83.185,147.701 86.233,144.653 v1(86.233,136.398)
NetC10_1: C10.1 U1.5 X1.2 | length 13.8
  Top Layer w0.3: U1.5 92.083,135.419 92.374,135.128 X1.2 99.695,135.128 100.139,135.572 C10.1
NetC11_1: C11.1 U1.6 X1.1 | length 15.8
  Top Layer w0.3: U1.6 90.199,135.919 94.488,140.208 X1.1 98.298,140.208 99.568,138.938 C11.1
NetC14_1: C14.1 C17.2 C18.2 D3.2 IC1.1 | length 21.3
  Top Layer w1.778: v1(73.025,105.795) 76.45,105.795 C14.1 76.581,105.736 77.12,106.275 80.142,106.275 81.657,107.79 IC1.1@83.15,107.79
  Bottom Layer w1.778: v1(73.025,105.795) D3.2 78.406,105.795 C17.2 82.55,104.699 C18.2
NetC21_1: C21.1 IC2.6 IC5.2 IC5.3 J2.2 J3.1 | length 36
  Bottom Layer w0.35: J2.2 67.939,120.009 67.939,122.168 71.374,125.603 79.551,125.603 81.026,124.128 J3.1 81.026,122.078 81.359,121.745 82.091,121.745 82.296,121.54 82.296,119.473 82.091,119.268 IC5.3
  Bottom Layer w1.778: J2.2@67.939,120.009 71.755,120.009 74.392,117.372 74.392,116.103 74.422,116.073 C21.1@74.422,114.173
NetC21_2: C21.2 IC2.5 R11.1 | length 6
  Bottom Layer w0.35: IC2.5 75.946,115.751 76.505,115.192 C21.2 76.479,114.021 76.479,111.658 R11.1
NetC23_2: C23.2 R12.1 R13.2 U1.18 | length 33.4
  Top Layer w0.3: R12.1 75.184,120.65 75.997,121.463 C23.2 ; C23.2@82.931,121.666 v1(82.931,122.936) ; v1@84.832,138.815 U1.18 ; v1(84.836,128.651) 87.249,126.238 v1(87.249,125.349)
  Top Layer w0.35: v1@84.832,138.815 v1(84.836,138.811)
  Bottom Layer w0.3: v1(82.931,122.936) 84.455,124.46 86.36,124.46 v1(87.249,125.349) ; v1(84.836,128.651) v1(84.836,138.811)
NetD1_1: D1.1 J1.1 | length 7.7
  Top Layer w1: 70.866,130.81 70.866,132.969 71.501,133.604 v1(72.263,133.604)
  Bottom Layer w1: v1(72.263,133.604) 74.426,133.604 75.065,132.965 75.215,132.965 75.565,132.615 D1.1
NetD3_1: D3.1 J4.2 | length 7.3
  Bottom Layer w1.778: J4.2 68.515,100.646 75.653,100.646 75.692,100.685 D3.1
NetD4_2: D4.2 IC1.2 L1.1 | length 31.1
  Top Layer w1.778: IC1.2@84.201,105.967 86.059,105.967 86.995,106.903 v1(86.995,109.728) 86.995,109.982 88.011,110.998 101.473,110.998 102.513,109.958 102.513,106.228 L1.1
  Bottom Layer w1.778: v1@86.995,110.014 87.118,110.137 D4.2
NetIC1_4: IC1.4 R8.1 R10.2 | length 65
  Top Layer w1.778: v1(79.502,99.949) 79.502,101.557 80.544,102.599 83.829,102.599 IC1.4 ; R8.1 115.57,114.681 v1(115.57,113.411)
  Bottom Layer w1.778: v1(79.502,99.949) 87.503,99.949 88.392,99.06 93.472,99.06 ; R10.2 91.694,100.838 93.472,99.06 ; v1(115.57,113.411) 115.57,100.991 113.639,99.06 93.472,99.06
NetIC2_1: IC2.1 IC5.4 | length 7.2
  Bottom Layer w0.35: IC2.1 74.996,119.097 75.348,118.745 78.318,118.745 78.884,119.311 78.884,119.531 79.25,119.897 80.157,119.897 IC5.4
NetIC2_2: IC2.2 R17.1 | length 3.1
  Bottom Layer w0.35: R17.1 75.309,123.065 75.309,122.303 75.946,121.666 IC2.2
NetIC2_3: IC2.3 IC5.5 | length 14.9
  Top Layer w0.35: v1(78.105,119.761) 79.424,118.442 87.327,118.442 87.884,118.999 v1(87.884,119.634)
  Bottom Layer w0.35: IC2.3 77.589,120.372 78.105,119.856 v1(78.105,119.761) ; IC5.5 85.953,119.903 87.869,119.903 87.884,119.888 v1(87.884,119.634)
NetIC3_2: IC3.2 R16.1 | length 3.7
  Top Layer w0.35: IC3.2 85.719,113.221 89.217,113.221 R16.1
NetIC3_6: IC3.6 R15.2 | length 31
  Top Layer w0.35: v1(78.613,114.427) 80.029,114.427 IC3.6 ; R15.2 91.166,117.767 91.948,116.985 v1(91.948,114.427)
  Bottom Layer w0.35: v1(78.613,114.427) 77.851,113.665 77.851,109.601 79.629,107.823 87.63,107.823 89.916,110.109 89.916,113.665 90.678,114.427 v1(91.948,114.427)
NetIC3_7: IC3.7 R14.2 | length 5.5
  Top Layer w0.35: R14.2 77.521,111.671 79.135,113.284 IC3.7
NetIC5_1: IC5.1 IC5.8 | length 5.8
  Bottom Layer w0.35: IC5.1 IC5.8
NetLED1_2: LED1.2 R4.1 | length 15.6
  Top Layer w0.35: v1(96.901,129.794) 97.712,129.794 97.917,129.589 LED1.2
  Bottom Layer w0.35: R4.1 90.424,135.128 95.758,129.794 v1(96.901,129.794)
NetLED2_2: LED2.2 R15.1 | length 12.3
  Top Layer w0.35: R15.1 89.535,115.951 89.027,116.459 89.027,118.68 89.6,119.253 94.918,119.253 95.123,119.048 LED2.2
NetLED3_2: LED3.2 R14.1 | length 3
  Top Layer w0.35: R14.1 75.436,109.73 76.198,109.73 76.454,109.474 LED3.2
NetP1_3: P1.3 R1.2 | length 3.8
  Bottom Layer w0.4: R1.2@86.233,126.835 86.333,126.735 89.815,126.735 P1.3 P1.3@89.873,126.591
NetP1_4: P1.4 R2.1 | length 4.2
  Top Layer w0.35: P1.4 92.695,126.873 93.599,126.873 95.123,125.349 R2.1
NetP2_1: P2.1 R21.1 | length 3.1
  Top Layer w0.3: P2.1@113.24,157.988 P2.1
  Top Layer w0.35: R21.1 P2.1@113.24,157.988
NetPW1_1: PW1.1 R9.2 | length 12.2
  Top Layer w0.35: PW1.1 99.568,113.157 102.235,115.824 102.235,117.983 104.394,120.142 R9.2
NetPW2_1: PW2.1 R18.1 | length 20
  Top Layer w0.35: v1(109.804,121.031) 109.871,121.098 109.985,121.098 110.998,122.111 PW2.1
  Bottom Layer w0.35: R18.1 101.346,110.252 104.013,112.919 104.013,117.047 107.997,121.031 v1(109.804,121.031)
NetQ1_2: Q1.2 U3.10 | length 7.1
  Top Layer w0.3: U3.10 107.569,153.67
  Top Layer w0.35: 107.569,153.67 108.712,153.67 109.601,152.781 Q1.2
NetQ1_3: Q1.3 R19.1 R20.2 | length 11.6
  Top Layer w0.3: R19.1 113.195,146.85 113.411,147.066 113.411,148.247 R20.2 114.935,148.336 115.316,148.717 115.316,153.157 114.742,153.731 Q1.3
NetR19_2: R19.2 U1.16 | length 27.9
  Top Layer w0.3: U1.16 85.857,140.693 85.857,141.374 86.596,142.113 92.583,142.113 94.742,144.272 108.966,144.272 109.982,145.288 R19.2
NetU1_12: U1.12 U3.1 | length 25.4
  Top Layer w0.35: U1.12 89.49,138.919 90.204,139.633 90.484,139.633 v1(90.551,139.7) ; U3.1 91.694,158.75 v1(92.837,157.607)
  Bottom Layer w0.35: v1(90.551,139.7) 90.551,142.748 93.599,145.796 93.599,156.845 v1(92.837,157.607)
NetU1_13: U1.13 U3.2 | length 25.6
  Top Layer w0.35: v1(87.249,138.303) 87.249,138.398 87.332,138.481 U1.13 ; U3.2 91.694,156.21 v1(92.329,155.575)
  Bottom Layer w0.35: v1(87.249,138.303) 87.884,138.303 88.519,138.938 88.519,141.986 92.329,145.796 v1(92.329,155.575)
NetU1_17: U1.17 U3.7 | length 22.1
  Top Layer w0.3: U1.17 85.332,141.128 85.357,141.153 85.357,141.582 86.904,143.129 92.202,143.129 95.123,146.05 U3.7
PC14: C5.2 U1.3 Y1.4 | length 17.5
  Top Layer w0.3: U1.3 90.552,134.419 94.289,130.683 98.183,130.683 99.695,129.171 99.695,128.651 99.873,128.473 Y1.4 101.188,128.675 101.188,130.358 100.863,130.683 C5.2
PC15: C6.2 U1.4 Y1.1 | length 31.7
  Top Layer w0.3: U1.4 91.268,134.919 94.516,131.671 99.857,131.671 100.774,132.588 104.013,132.588 105.41,131.191 105.41,126.619 104.064,125.273 Y1.1 101.39,123.488 100.279,122.377 C6.2
RST: H1.3 U1.40 | length 37.1
  Top Layer w0.3: v1(78.105,136.224) 78.105,144.272 v1(79.883,146.05) ; v1(78.232,130.683) 79.091,129.824 83.156,129.824 83.332,130 U1.40
  Bottom Layer w0.3: H1.3 75.946,156.337 79.883,152.4 v1(79.883,146.05) ; v1(78.105,136.224) 78.105,130.81 v1(78.232,130.683)
RXD: H1.4 U1.30 | length 25.6
  Top Layer w0.3: v1(80.01,144.78) 79.099,143.869 79.099,136.723 79.377,136.444 80.059,136.444 U1.30
  Bottom Layer w0.3: H1.4 73.406,156.21 78.232,151.384 78.232,146.558 v1(80.01,144.78)
SCL2: U1.25
SDA2: U1.22
STM32_RX: H1.5 U1.31 | length 27.4
  Top Layer w0.3: U1.31 80.977,135.919 81.153,136.095 81.153,142.367 v1(80.264,143.256)
  Bottom Layer w0.3: H1.5 70.866,156.337 77.279,149.923 77.279,146.24 v1(80.264,143.256)
SWDCLK: C8.3 U1.37 | length 12.9
  Top Layer w0.3: v1(79.883,131.699) U1.37@81.832,131.699
  Bottom Layer w0.3: C8.3 78.867,139.319 79.121,139.065 79.121,132.461 v1(79.883,131.699)
SWDIO: C8.2 U1.34 | length 14.6
  Top Layer w0.3: U1.34 v1(82.042,134.419)
  Bottom Layer w0.3: C8.2 76.073,141.986 80.163,141.986 82.042,140.107 v1(82.042,134.419)
USB_N: J1.2 U1.32 | length 11.5
  Top Layer w0.254: 78.523,135.419 U1.32
  Top Layer w0.381: J1.2 72.928,129.824 78.523,135.419
USB_P: J1.3 U1.33 | length 11.6
  Top Layer w0.254: 78.867,134.919 U1.33
  Top Layer w0.381: J1.3 73.152,129.174 73.167,129.189 73.191,129.189 78.867,134.865
VBAT: C20.2 C22.2 IC3.5 J2.1 J4.1 R11.2 R12.2 | length 33.2
  Top Layer w1.778: J4.1 v1(68.453,111.184) 68.068,111.569 68.068,114.558 J2.1 73.368,114.808 ; R12.2@75.019,116.459 73.368,114.808 ; C20.2 74.625,114.808 73.368,114.808 ; R12.2 79.892,116.421 IC3.5@80.156,116.158
  Bottom Layer w1.778: v1(68.453,111.184) 73.025,111.184 73.025,110.693 C22.2 ; 73.279,111.184 74.189,111.184 R11.2
pads on no net: IC2.4 IC4.4 J1.4 U1.1 U1.8 U1.9 U1.10 U1.11 U1.14 U1.15 U1.21 U1.26 U1.27 U1.28 U1.29 U1.38 U1.39 U1.41 U1.42 U1.43 U1.45 U1.46 U3.6 U3.8 U3.9

## Polygon pours and split planes (outlines as drawn)
GND on Top Layer "GND_L01_P022" (solid, remove dead copper, pour order 22): 118.364,162.814 63.246,162.814 63.246,97.155 118.364,97.155
no net on Top Layer "NONET_L01_P020" (solid, pour order 20): 63.246,162.687
no net on Top Layer "NONET_L01_P002" (solid, pour order 2): 63.246,162.687
no net on Top Layer "NONET_L01_P000" (solid, pour order 0): 63.246,162.687
GND on Bottom Layer "GND_L02_P024" (solid, remove dead copper, pour order 24): 118.364,97.155 118.364,162.814 63.246,162.814 63.246,97.155

## Keep-outs
Keep-Out Layer:
  lines w0.254: 114.046,164.609 114.046,162.814 113.538,162.814 67.564,162.814 67.564,164.61 ccw(c65.405,164.592) 63.246,164.609 63.246,95.25 ; 114.05,164.609 cw(c116.205,164.592) 118.36,164.61 ; 118.364,164.61 118.364,145.987 118.364,112.841 118.364,95.759 118.364,95.36 ; 63.246,95.25 ccw(c65.405,95.268) 67.564,95.251 ; 63.246,95.25 63.246,95.25 ; 67.564,95.251 67.564,97.155 114.046,97.155 114.046,95.359 ; 67.564,95.251 67.564,95.251 ; 114.046,95.359 ccw(c116.205,95.377) 118.364,95.36 ; 114.046,95.359 114.046,95.359 ; 118.364,95.36 118.364,95.36

## Other copper
Bottom Layer:
  pour cut-out: 81.915,152.146

## Text inside footprints (layer, text, board x,y; h text height)
C13: Top Overlay "+" at 76.373,127.706 h0.89
C14: Top Overlay "+" at 76.906,105.528 h0.89 r270